# Altium PCB EXPANSION_BOARD.PcbDoc (part 2 of 2)
Units mm, origin at the board's own origin, x right, y up, seen from the top; angles counter-clockwise.
Board outline 115 x 60 mm, 2 copper layers (Top Layer, Bottom Layer), stack 1.58 mm thick; 104 components, 102 nets, 387 pads, 32 vias.
Unrouted connection lines stored in the file: 210.
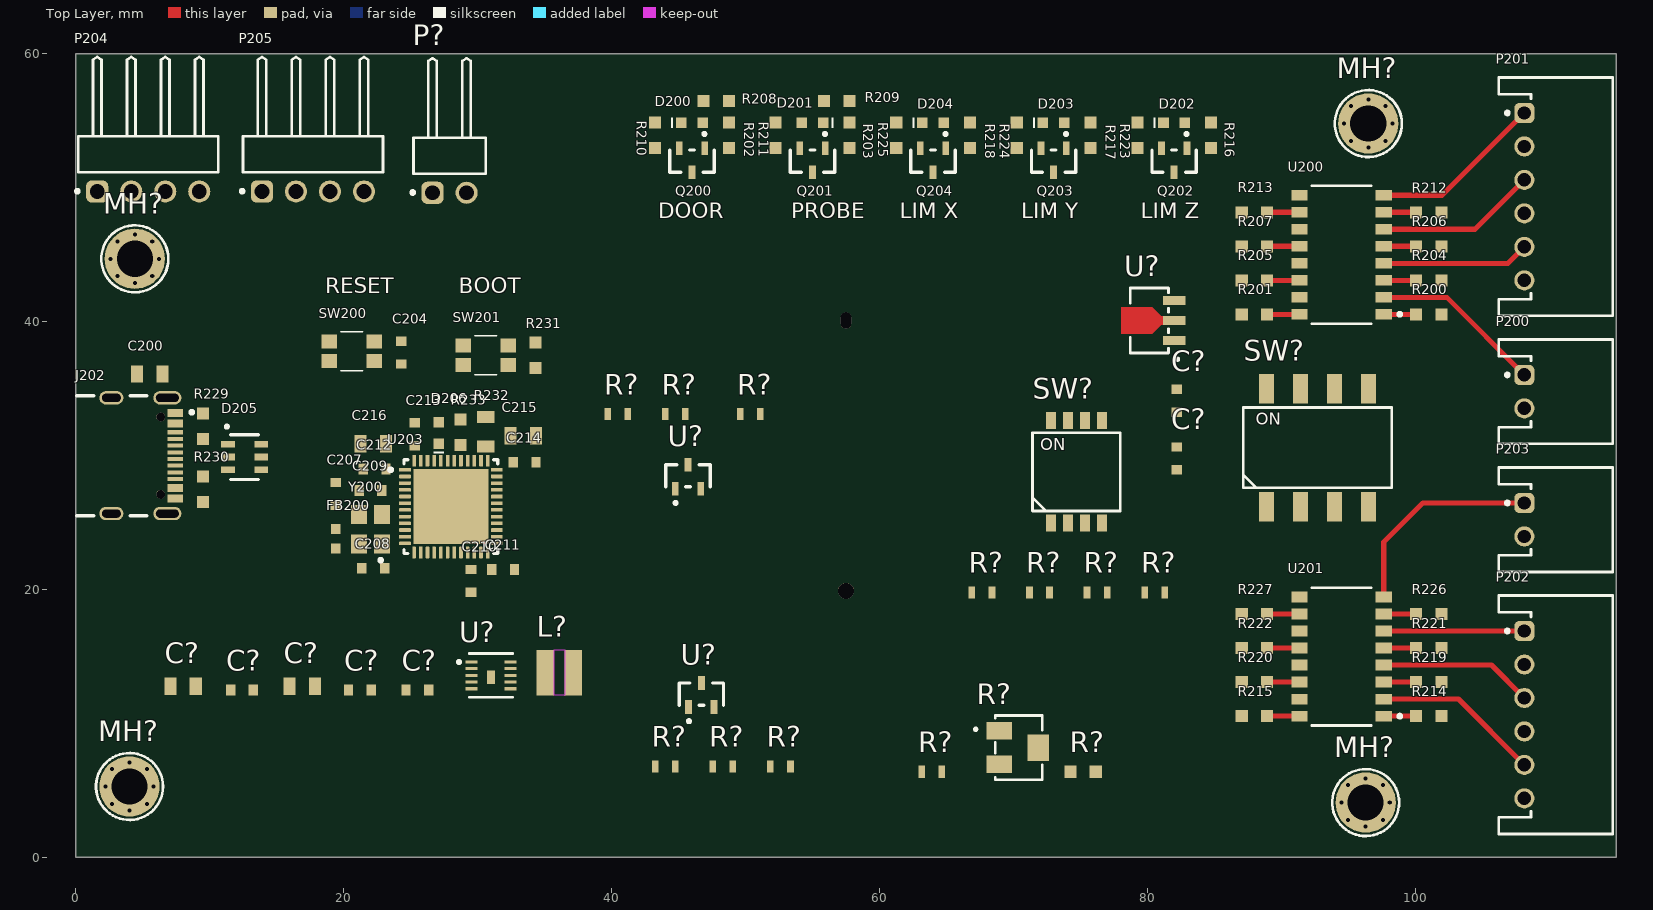
[diagram p0: Top Layer view]

## Part data (continued)
R210 R211 R223 R224 R225 R233: library part RC0603FR-07200RL, "RES 200 OHM 1% 1/10W 0603", Case Code (Imperial)=0603, Case Code (Metric)=1608, Manufacturer="Yageo Group", Max Operating Temperature=155°C, Max Power Dissipation=100mW, Min Operating Temperature=-55°C, Supplier Part Number=311-200HRCT-ND, Temperature Coefficient=±200ppm/°C, Tolerance=1%, Voltage Rating=75V, Voltage Rating (AC)=50V, Case/Package=0603, Category="Chip SMD Resistors", China RoHS=Non-Compliant, Component Link Description=https://www.yageogroup.com/content/datasheet/asset/file/PYU-RC_GROUP_51_ROHS_L, Component Link URL=https://www.yageogroup.com/content/datasheet/asset/file/PYU-RC_GROUP_51_ROHS_L, Composition="Thick Film", Contact Plating=Tin, Datasheet=https://www.yageogroup.com/content/datasheet/asset/file/PYU-RC_GROUP_51_ROHS_L, Depth=800µm, Features="Moisture Resistant", Height=450µm, Lead Free="Lead Free", Length=1.6mm, Lifecycle Status=Production, Manufacturer Part Number=RC0603FR-07200RL, Military Standard=Not, Mounting Technology="Surface Mount", Number of Terminals=2, Number of Terminations=2, Packaging="Tape & Reel", Power Dissipation=100mW, Power Rating=100mW, Radiation Hardening=No, REACH SVHC=Yes, RoHS=Compliant, Supplier=DigiKey, Termination=SMD/SMT, Voltage Rating (DC)=50V, Weight=2.012816mg, Width=800µm, Working Voltage=75V
R229 R230: library part RC0603FR-075K11L, "RES 5.11K OHM 1% 1/10W 0603", Case Code (Imperial)=0603, Case Code (Metric)=1608, Manufacturer="Yageo Group", Max Operating Temperature=155°C, Max Power Dissipation=100mW, Min Operating Temperature=-55°C, Supplier Part Number=311-5.11KHRCT-ND, Temperature Coefficient=±200ppm/°C, Tolerance=1%, Voltage Rating=75V, Voltage Rating (AC)=50V, Case/Package=0603, Category="Chip SMD Resistors", China RoHS=Non-Compliant, Component Link Description=https://www.yageogroup.com/content/datasheet/asset/file/PYU-RC_GROUP_51_ROHS_L, Component Link URL=https://www.yageogroup.com/content/datasheet/asset/file/PYU-RC_GROUP_51_ROHS_L, Composition="Thick Film", Contact Plating=Tin, Datasheet=https://www.yageogroup.com/content/datasheet/asset/file/PYU-RC_GROUP_51_ROHS_L, Depth=800µm, Features="Moisture Resistant", Height=450µm, Lead Free="Lead Free", Length=1.6mm, Lifecycle Status=Production, Manufacturer Part Number=RC0603FR-075K11L, Military Standard=Not, Mounting Technology="Surface Mount", Number of Terminals=2, Number of Terminations=2, Packaging="Tape & Reel", Power Dissipation=100mW, Power Rating=100mW, Radiation Hardening=No, REACH SVHC=Yes, RoHS=Compliant, Supplier=DigiKey, Termination=SMD/SMT, Voltage Rating (DC)=50V, Weight=2.012816mg, Width=800µm, Working Voltage=75V
R232: library part RC0805FR-070RL, "RES 0 OHM 1% 1/8W 0805", Case/Package=0805, Manufacturer="Yageo Group", Max Operating Temperature=155°C, Min Operating Temperature=-55°C, Power Dissipation=125mW, Supplier Part Number=311-0.0CRCT-ND, Temperature Coefficient=100ppm/°C, Tolerance=1%, Voltage Rating=150V, Category="Chip SMD Resistors", China RoHS=Non-Compliant, ComponentLink1Description=https://datasheet.octopart.com:443/RC0805FR-070RL-Yageo-datasheet-127823281.pdf?src-supplier=Upverter, ComponentLink1URL=https://datasheet.octopart.com:443/RC0805FR-070RL-Yageo-datasheet-127823281.pdf?src-supplier=Upverter, ComponentLink2Description=https://datasheet.octopart.com:443/RC0805FR-070RL-Yageo-datasheet-17879891.pdf?src-supplier=IHS, ComponentLink2URL=https://datasheet.octopart.com:443/RC0805FR-070RL-Yageo-datasheet-17879891.pdf?src-supplier=IHS, ComponentLink3Description=https://datasheet.octopart.com:443/RC0805FR-070RL-Yageo-datasheet-8330313.pdf?src-supplier=Burklin+Elektronik, ComponentLink3URL=https://datasheet.octopart.com:443/RC0805FR-070RL-Yageo-datasheet-8330313.pdf?src-supplier=Burklin+Elektronik, ComponentLink4Description=https://datasheet.octopart.com:443/RC0805FR-070RL-Yageo-datasheet-164759695.pdf?src-supplier=Future+Electronics, ComponentLink4URL=https://datasheet.octopart.com:443/RC0805FR-070RL-Yageo-datasheet-164759695.pdf?src-supplier=Future+Electronics, ComponentLink5Description=https://datasheet.octopart.com:443/RC0805FR-070RL-Yageo-datasheet-12592811.pdf?src-supplier=Future+Electronics, ComponentLink5URL=https://datasheet.octopart.com:443/RC0805FR-070RL-Yageo-datasheet-12592811.pdf?src-supplier=Future+Electronics, ComponentLink6Description=https://datasheet.octopart.com:443/RC0805FR-070RL-Yageo-datasheet-8324252.pdf?src-supplier=Future+Electronics, ComponentLink6URL=https://datasheet.octopart.com:443/RC0805FR-070RL-Yageo-datasheet-8324252.pdf?src-supplier=Future+Electronics, ComponentLink7Description=https://datasheet.octopart.com:443/RC0805FR-070RL-Yageo-datasheet-141265859.pdf?src-supplier=TME, ComponentLink7URL=https://datasheet.octopart.com:443/RC0805FR-070RL-Yageo-datasheet-141265859.pdf?src-supplier=TME, ComponentLink8Description=https://datasheet.octopart.com/RC0805FR-070RL-Yageo-datasheet-73766026.pdf, ComponentLink8URL=https://datasheet.octopart.com/RC0805FR-070RL-Yageo-datasheet-73766026.pdf, ComponentLink9Description=http://sigma.octopart.com:80/conflict_mineral_statement/Yageo-company-3.pdf?src-supplier=Compliance+Statements, ComponentLink9URL=http://sigma.octopart.com:80/conflict_mineral_statement/Yageo-company-3.pdf?src-supplier=Compliance+Statements, ComponentLink10Description=http://sigma.octopart.com:80/rohs_statement/Yageo-company-2.pdf?src-supplier=Compliance+Statements, ComponentLink10URL=http://sigma.octopart.com:80/rohs_statement/Yageo-company-2.pdf?src-supplier=Compliance+Statements, Composition="Thick Film", Contact Plating=Tin, Depth=1.25mm, Height=500µm, Lead Free="Lead Free", Length=2mm, Lifecycle Status=Production, Manufacturer Part Number=RC0805FR-070RL, Military Standard=Not, Mounting Technology="Surface Mount", Number of Terminals=2, Power Rating=125mW, Pricing="1=0.1, 10=0.017, 25=0.0144, 50=0.0124, 100=0.0109, 250=0.00916, 500=0.00808, 1000=0.00715 (USD)", Radiation Hardening=No, REACH SVHC=Yes, RoHS=Compliant, Stock=748818, Supplier=DigiKey, Width=1.25mm
R?: library part RC0603FR-070RL, "RES 0 OHM 1% 1/10W 0603", Case Code (Imperial)=0603, Case Code (Metric)=1608, Manufacturer="Yageo Group", Max Operating Temperature=155°C, Max Power Dissipation=100mW, Min Operating Temperature=-55°C, Supplier Part Number=311-0.0HRCT-ND, Temperature Coefficient=±200ppm/°C, Tolerance=1%, Voltage Rating=75V, Voltage Rating (AC)=50V, Case/Package=0603, Category="Chip SMD Resistors", China RoHS=Non-Compliant, Component Link Description=https://www.yageogroup.com/content/datasheet/asset/file/PYU-RC_GROUP_51_ROHS_L, Component Link URL=https://www.yageogroup.com/content/datasheet/asset/file/PYU-RC_GROUP_51_ROHS_L, Composition="Thick Film", Contact Plating=Tin, Datasheet=https://www.yageogroup.com/content/datasheet/asset/file/PYU-RC_GROUP_51_ROHS_L, Depth=800µm, Features="Moisture Resistant", Height=450µm, Lead Free="Lead Free", Length=1.6mm, Lifecycle Status=Production, Manufacturer Part Number=RC0603FR-070RL, Military Standard=Not, Mounting Technology="Surface Mount", Number of Terminals=2, Number of Terminations=2, Packaging="Tape & Reel", Power Dissipation=100mW, Power Rating=100mW, Radiation Hardening=No, REACH SVHC=Yes, RoHS=Compliant, Supplier=DigiKey, Termination=SMD/SMT, Voltage Rating (DC)=50V, Weight=2.012816mg, Width=800µm, Working Voltage=75V
R? R?: library part RC0603FR-07100RL, "RES 100 OHM 1% 1/10W 0603", Case Code (Imperial)=0603, Case Code (Metric)=1608, Manufacturer="Yageo Group", Max Operating Temperature=155°C, Max Power Dissipation=100mW, Min Operating Temperature=-55°C, Supplier Part Number=311-100HRCT-ND, Temperature Coefficient=±200ppm/°C, Tolerance=1%, Voltage Rating=75V, Voltage Rating (AC)=50V, Case/Package=0603, Category="Chip SMD Resistors", China RoHS=Non-Compliant, Component Link Description=https://www.yageogroup.com/content/datasheet/asset/file/PYU-RC_GROUP_51_ROHS_L, Component Link URL=https://www.yageogroup.com/content/datasheet/asset/file/PYU-RC_GROUP_51_ROHS_L, Composition="Thick Film", Contact Plating=Tin, Datasheet=https://www.yageogroup.com/content/datasheet/asset/file/PYU-RC_GROUP_51_ROHS_L, Depth=800µm, Features="Moisture Resistant", Height=450µm, Lead Free="Lead Free", Length=1.6mm, Lifecycle Status=Production, Manufacturer Part Number=RC0603FR-07100RL, Military Standard=Not, Mounting Technology="Surface Mount", Number of Terminals=2, Number of Terminations=2, Packaging="Tape & Reel", Power Dissipation=100mW, Power Rating=100mW, Radiation Hardening=No, REACH SVHC=Yes, RoHS=Compliant, Supplier=DigiKey, Termination=SMD/SMT, Voltage Rating (DC)=50V, Weight=2.012816mg, Width=800µm, Working Voltage=75V
R?: library part 3224W-1-103G, "TRIMMER 10K OHM 0.25W J LEAD TOP", Manufacturer=Bourns, Max Operating Temperature=150°C, Max Power Dissipation=250mW, Min Operating Temperature=-65°C, Supplier Part Number=3224W-1-103GCT-ND, Temperature Coefficient=100ppm/°C, Tolerance=10%, Working Voltage=300V, Category="Variable Resistors and Potentiometers", ComponentLink1Description=https://datasheet.octopart.com:443/3224W-1-103G-Bourns-datasheet-182141393.pdf?src-supplier=IHS, ComponentLink1URL=https://datasheet.octopart.com:443/3224W-1-103G-Bourns-datasheet-182141393.pdf?src-supplier=IHS, ComponentLink2Description=https://datasheet.octopart.com:443/3224W-1-103G-Bourns-datasheet-156011607.pdf?src-supplier=element14+APAC, ComponentLink2URL=https://datasheet.octopart.com:443/3224W-1-103G-Bourns-datasheet-156011607.pdf?src-supplier=element14+APAC, ComponentLink3Description=https://datasheet.octopart.com:443/3224W-1-103G-Bourns-datasheet-64275176.pdf?src-supplier=Master+Electronics, ComponentLink3URL=https://datasheet.octopart.com:443/3224W-1-103G-Bourns-datasheet-64275176.pdf?src-supplier=Master+Electronics, ComponentLink4Description=https://datasheet.octopart.com:443/3224W-1-103G-Bourns-datasheet-11533694.pdf?src-supplier=Arrow+Electronics, ComponentLink4URL=https://datasheet.octopart.com:443/3224W-1-103G-Bourns-datasheet-11533694.pdf?src-supplier=Arrow+Electronics, ComponentLink5Description=http://sigma.octopart.com:80/conflict_mineral_statement/Bourns-company-36.pdf?src-supplier=Compliance+Statements, ComponentLink5URL=http://sigma.octopart.com:80/conflict_mineral_statement/Bourns-company-36.pdf?src-supplier=Compliance+Statements, Composition=Cermet, Depth=3.9mm, Height=5.1mm, Length=4.8mm, Lifecycle Status=Production, Manufacturer Part Number=3224W-1-103G, Military Standard=Not, Mounting Technology="Surface Mount", Number of Terminals=3, Number of Turns=12, Packaging="Tape & Reel (TR)", Power Rating=250mW, Pricing="1=3.93, 10=3.271, 25=3.038, 50=2.8722, 100=2.7147, 250=2.51884, 500=2.3796 (USD)", REACH SVHC=No, RoHS=Compliant, Stock=792, Supplier=DigiKey, Termination=SMD/SMT, Width=3.5mm
R? R?: library part RC0603FR-0711K5L, "RES 11.5K OHM 1% 1/10W 0603", Case Code (Imperial)=0603, Case Code (Metric)=1608, Manufacturer="Yageo Group", Max Operating Temperature=155°C, Max Power Dissipation=100mW, Min Operating Temperature=-55°C, Supplier Part Number=311-11.5KHRCT-ND, Temperature Coefficient=±200ppm/°C, Tolerance=1%, Voltage Rating=75V, Voltage Rating (AC)=50V, Case/Package=0603, Category="Chip SMD Resistors", China RoHS=Non-Compliant, Component Link Description=https://www.yageogroup.com/content/datasheet/asset/file/PYU-RC_GROUP_51_ROHS_L, Component Link URL=https://www.yageogroup.com/content/datasheet/asset/file/PYU-RC_GROUP_51_ROHS_L, Composition="Thick Film", Contact Plating=Tin, Datasheet=https://www.yageogroup.com/content/datasheet/asset/file/PYU-RC_GROUP_51_ROHS_L, Depth=800µm, Features="Moisture Resistant", Height=450µm, Lead Free="Lead Free", Length=1.6mm, Lifecycle Status=Production, Manufacturer Part Number=RC0603FR-0711K5L, Military Standard=Not, Mounting Technology="Surface Mount", Number of Terminals=2, Number of Terminations=2, Packaging="Tape & Reel", Power Dissipation=100mW, Power Rating=100mW, Radiation Hardening=No, REACH SVHC=Yes, RoHS=Compliant, Supplier=DigiKey, Termination=SMD/SMT, Voltage Rating (DC)=50V, Weight=2.012816mg, Width=800µm, Working Voltage=75V
R?: library part RC0603FR-071KL, "RES 1K OHM 1% 1/10W 0603", Case Code (Imperial)=0603, Case Code (Metric)=1608, Manufacturer="Yageo Group", Max Operating Temperature=155°C, Max Power Dissipation=100mW, Min Operating Temperature=-55°C, Supplier Part Number=311-1.00KHRCT-ND, Temperature Coefficient=±200ppm/°C, Tolerance=1%, Voltage Rating=75V, Voltage Rating (AC)=50V, Case/Package=0603, Category="Chip SMD Resistors", China RoHS=Non-Compliant, Component Link Description=https://www.yageogroup.com/content/datasheet/asset/file/PYU-RC_GROUP_51_ROHS_L, Component Link URL=https://www.yageogroup.com/content/datasheet/asset/file/PYU-RC_GROUP_51_ROHS_L, Composition="Thick Film", Contact Plating=Tin, Datasheet=https://www.yageogroup.com/content/datasheet/asset/file/PYU-RC_GROUP_51_ROHS_L, Depth=800µm, Features="Moisture Resistant", Height=450µm, Lead Free="Lead Free", Length=1.6mm, Lifecycle Status=Production, Manufacturer Part Number=RC0603FR-071KL, Military Standard=Not, Mounting Technology="Surface Mount", Number of Terminals=2, Number of Terminations=2, Packaging="Tape & Reel", Power Dissipation=100mW, Power Rating=100mW, Radiation Hardening=No, REACH SVHC=Yes, RoHS=Compliant, Supplier=DigiKey, Termination=SMD/SMT, Voltage Rating (DC)=50V, Weight=2.012816mg, Width=800µm, Working Voltage=75V
R? R?: library part RC0603FR-078K87L, "RES 8.87K OHM 1% 1/10W 0603", Case Code (Imperial)=0603, Case Code (Metric)=1608, Manufacturer="Yageo Group", Max Operating Temperature=155°C, Max Power Dissipation=100mW, Min Operating Temperature=-55°C, Supplier Part Number=311-8.87KHRCT-ND, Temperature Coefficient=±200ppm/°C, Tolerance=1%, Voltage Rating=75V, Voltage Rating (AC)=50V, Case/Package=0603, Category="Chip SMD Resistors", China RoHS=Non-Compliant, Component Link Description=https://www.yageogroup.com/content/datasheet/asset/file/PYU-RC_GROUP_51_ROHS_L, Component Link URL=https://www.yageogroup.com/content/datasheet/asset/file/PYU-RC_GROUP_51_ROHS_L, Composition="Thick Film", Contact Plating=Tin, Datasheet=https://www.yageogroup.com/content/datasheet/asset/file/PYU-RC_GROUP_51_ROHS_L, Depth=800µm, Features="Moisture Resistant", Height=450µm, Lead Free="Lead Free", Length=1.6mm, Lifecycle Status=Production, Manufacturer Part Number=RC0603FR-078K87L, Military Standard=Not, Mounting Technology="Surface Mount", Number of Terminals=2, Number of Terminations=2, Packaging="Tape & Reel", Power Dissipation=100mW, Power Rating=100mW, Radiation Hardening=No, REACH SVHC=Yes, RoHS=Compliant, Supplier=DigiKey, Termination=SMD/SMT, Voltage Rating (DC)=50V, Weight=2.012816mg, Width=800µm, Working Voltage=75V
SW200 SW201: "WS-TASV J-Bend SMT Tact Switch, 3.5mm x 2.9mm x 1.7mm, SPST-NO, 350gf, 12V, 50mA", Manufacturer="Wurth Elektronik", Operating Temperature Max=85degC, Operating Temperature Min=-40degC, Rated Current=50mA, Rated Voltage (DC)=12V, Category="Tact Switch", Circuit=SPST-NO, ComponentLink1Description="Website Link", ComponentLink1URL=https://www.we-online.com, ComponentLink2Description="Datasheet Link", ComponentLink2URL=https://www.we-online.com/components/products/datasheet/434153017835, Contact Material="Stainless Steel", Contact Plating=Silver, Height=1.7mm, Length=3.5mm, Manufacturer Part Number=434153017835, Match Code=WS-TASV, Mount="Surface Mount", Operation Force=350gf, Packaging="Tape and Reel", Terminal Material="Copper Alloy", Terminal Plating=Silver, Washable=No, Width=2.9mm
SW?: "WS-DISV Small Compact SMT Dip Switch, Raised Actuator, pitch 2.54mm, 4p", Manufacturer="Wurth Elektronik", Operating Temperature Max=85degC, Operating Temperature Min=-40degC, Rated Current Non-Switching=100mA, Rated Current Switching=25mA, Rated Voltage Non-Switching=50VDC, Rated Voltage Switching=24VDC, Actuator Type="Raise Type", Category="Dip Switches", ComponentLink1Description="Website Link", ComponentLink1URL=https://www.we-online.com/redexpert/article/418121270804?ad, ComponentLink2Description="Datasheet Link", ComponentLink2URL=https://www.we-online.com/redexpert/spec/418121270804?ad, Contact Material="Copper Alloy", Contact Plating=Gold, Manufacturer Part Number=418121270804, Match Code=WS-DISV, Mount="Surface Mount", Number of Poles=4, Operation Force=600g, Packaging="Tape and Reel", Pitch=2.54mm
SW?: "WS-DISV Small Compact SMD Dip Switch, Flat Actuator with Top Tape, pitch 1.27mm, 4p", Manufacturer="Wurth Elektronik", Max Operating Temperature=85°C, Min Operating Temperature=-40°C, Rated Current Non-Switching=100mA, Rated Current Switching=25mA, Rated Voltage Non-Switching=50VDC, Rated Voltage Switching=24VDC, Actuator Type="Flat Type", Category="Dip Switches", ComponentLink1Description="Website Link", ComponentLink1URL=https://www.we-online.com/redexpert/article/416131160804?ad, ComponentLink2Description="Datasheet Link", ComponentLink2URL=https://www.we-online.com/redexpert/spec/416131160804?ad, Contact Material="Copper Alloy", Contact Plating=Gold, Manufacturer Part Number=416131160804, Match Code=WS-DISV, Mount="Surface Mount", Number of Poles=4, Operation Force=500g, Packaging="Tape and Reel", Pitch=1.27mm
U200 U201: "OPTOISO 3.75KV 4CH TRANS 16-SO", Case/Package=SOIC, Collector Emitter Breakdown Voltage=80V, Collector Emitter Saturation Voltage=300mV, Current Transfer Ratio=50%, Dark Current=80nA, Forward Current=50mA, Forward Voltage=1.4V, Isolation Voltage=3.75kV, Manufacturer=Toshiba, Manufacturer Part Number=TLP293-4(TP,E, Max Junction Temperature (Tj)=125°C, Max Power Dissipation=100mW, Min Operating Temperature=-55°C, Supplier Part Number=TLP293-4(TPECT-ND, Category=Optocouplers, Collector Emitter Voltage (VCEO)=300mV, ComponentLink1Description=https://datasheet.octopart.com:443/TLP293-4%28TP%2CE-Toshiba-datasheet-165584699.pdf?src-supplier=IHS, ComponentLink1URL=https://datasheet.octopart.com:443/TLP293-4%28TP%2CE-Toshiba-datasheet-165584699.pdf?src-supplier=IHS, ComponentLink2Description=https://datasheet.octopart.com:443/TLP293-4%28TP%2CE-Toshiba-datasheet-62096132.pdf?src-supplier=Upverter, ComponentLink2URL=https://datasheet.octopart.com:443/TLP293-4%28TP%2CE-Toshiba-datasheet-62096132.pdf?src-supplier=Upverter, Height=2.3mm, Lifecycle Status=Production, Max Operating Temperature=125°C, Max Output Voltage=80V, Mounting Technology="Surface Mount", Number of Channels=4, Number of Elements=4, Output Current per Channel=50mA, Packaging="Tape & Reel (TR)", Pins=16, Pricing="1=1.54, 10=1.093, 100=0.8233, 500=0.704, 1000=0.66505 (USD)", REACH SVHC=Yes, RoHS=Compliant, Schedule B="8541408000, 8541408000|8541408000|8541408000|8541408000|8541408000", Stock=42408, Supplier=DigiKey, Turn-Off Delay Time=3µs, Turn-On Delay Time=3µs
U203: "IC MCU 32BIT 512KB FLSH 48UFQFPN", Case/Package=UFQFPN, Clock Frequency=26MHz, Frequency=100MHz, Manufacturer=STMicroelectronics, Max Operating Temperature=85°C, Max Power Dissipation=625mW, Max Supply Current=34.5mA, Max Supply Voltage=3.6V, Min Operating Temperature=-40°C, Min Supply Voltage=1.7V, Nominal Supply Current=1.8µA, Operating Supply Voltage=3.3V, Supplier Part Number=497-14907-ND, ADC Channels (Resolution)="10-Ch 12-Bit", Category=Microcontrollers, China RoHS=Compliant, ComponentLink1Description=https://datasheet.octopart.com:443/STM32F411CEU6-STMicroelectronics-datasheet-41919523.pdf?src-supplier=element14+APAC, ComponentLink1URL=https://datasheet.octopart.com:443/STM32F411CEU6-STMicroelectronics-datasheet-41919523.pdf?src-supplier=element14+APAC, ComponentLink2Description=https://datasheet.octopart.com:443/STM32F411CEU6-STMicroelectronics-datasheet-27102711.pdf?src-supplier=Upverter, ComponentLink2URL=https://datasheet.octopart.com:443/STM32F411CEU6-STMicroelectronics-datasheet-27102711.pdf?src-supplier=Upverter, ComponentLink3Description=https://datasheet.octopart.com:443/STM32F411CEU6-STMicroelectronics-datasheet-114750309.pdf?src-supplier=Newark, ComponentLink3URL=https://datasheet.octopart.com:443/STM32F411CEU6-STMicroelectronics-datasheet-114750309.pdf?src-supplier=Newark, ComponentLink4Description=https://datasheet.octopart.com:443/STM32F411CEU6-STMicroelectronics-datasheet-34219326.pdf?src-supplier=Newark, ComponentLink4URL=https://datasheet.octopart.com:443/STM32F411CEU6-STMicroelectronics-datasheet-34219326.pdf?src-supplier=Newark, ComponentLink5Description=https://datasheet.octopart.com:443/STM32F411CEU6-STMicroelectronics-datasheet-82511007.pdf?src-supplier=SHENGYU+ELECTRONICS, ComponentLink5URL=https://datasheet.octopart.com:443/STM32F411CEU6-STMicroelectronics-datasheet-82511007.pdf?src-supplier=SHENGYU+ELECTRONICS, Core Architecture="ARM Cortex-M4", Data Bus Width=32b, EEPROM Memory Size=0B, Flash Memory Size=512kB, Height - Seated (Max)=600µm, Interface="SDIO, USB", Lead Free="Lead Free", Length=7mm, Lifecycle Status=Production, Manufacturer Part Number=STM32F411CEU6, Memory Format=FLASH, Memory Size=512kB, Mounting Technology="Surface Mount", Number of A/D Converters=1, Number of ADC Channels=16, Number of Channels=10, Number of I2C Channels=3, Number of I/Os=36, Number of Interrupts=16, Number of Programmable I/O=36, Number of SPI Channels=5, Number of Terminals=48, Number of Timers/Counters=2, Number of USART Channels=3, Oscillator Type=Internal, Packaging="Cut Tape", Peripherals=POR, Pins=48, Pricing="1=6.18, 10=4.745, 25=4.386, 100=3.991, 260=3.79569, 520=3.68344, 1040=3.59105, 2600=3.49353 (USD)", Radiation Hardening=No, RAM Size=128kB, REACH SVHC=Yes, RoHS=Compliant, Schedule B="8542310000, 8542310000|8542310000|8542310000|8542310000|8542310000|8542310000|8542310000|8542310000|8542310000|8542310000|8542310000|8542310000|8542310000|8542310000|8542310000|8542310000|8542310000|8542310000|8542310000|8542310000|8542310000|8542310000|8542310000|85", Stock=3816, Supplier=DigiKey, Terminal Pitch=500µm, Watchdog Timer=Yes, Width=7mm
U?: "IC REG LINEAR 3.3V 200MA SOT89", Manufacturer=STMicroelectronics, Max Junction Temperature (Tj)=125°C, Max Supply Voltage=13.2V, Min Input Voltage=4.3V, Output Current=200mA, Output Voltage=3.3V, Supplier Part Number=497-17107-1-ND, Voltage Tolerance=3%, Category="LDO Voltage Regulators", China RoHS=Compliant, ComponentLink1Description=https://datasheet.octopart.com:443/LDK220U33R-STMicroelectronics-datasheet-164563982.pdf?src-supplier=IHS, ComponentLink1URL=https://datasheet.octopart.com:443/LDK220U33R-STMicroelectronics-datasheet-164563982.pdf?src-supplier=IHS, ComponentLink2Description=https://datasheet.octopart.com:443/LDK220U33R-STMicroelectronics-datasheet-78844600.pdf?src-supplier=HQonline, ComponentLink2URL=https://datasheet.octopart.com:443/LDK220U33R-STMicroelectronics-datasheet-78844600.pdf?src-supplier=HQonline, ComponentLink3Description=https://datasheet.octopart.com:443/LDK220U33R-STMicroelectronics-datasheet-101746762.pdf?src-supplier=SHENGYU+ELECTRONICS, ComponentLink3URL=https://datasheet.octopart.com:443/LDK220U33R-STMicroelectronics-datasheet-101746762.pdf?src-supplier=SHENGYU+ELECTRONICS, Height - Seated (Max)=1.6mm, Length=4.5mm, Lifecycle Status=Production, Manufacturer Part Number=LDK220U33R, Number of Channels=1, Number of Circuits=1, Number of Outputs=1, Number of Terminals=3, Output Type=Fixed, Packaging="Cut Tape", Pricing="1=0.39, 10=0.268, 25=0.2388, 100=0.2061, 250=0.1906, 500=0.18124, 1000=0.17353 (USD)", REACH SVHC=Yes, RoHS=Compliant, Schedule B="8542390000, 8542390000|8542390000|8542390000|8542390000|8542390000", Stock=20368, Supplier=DigiKey, Terminal Pitch=1.495mm, Width=2.445mm
U?: "IC REG BUCK 3.3V 300MA 10DFN", Manufacturer=STMicroelectronics, Max Operating Temperature=150°C, Max Output current=300mA, Max Output Voltage=60V, Max Switching Frequency=2.42MHz, Min Input Voltage=3.5V, Min Operating Temperature=-40°C, Min Output Voltage=850mV, Nominal Output Voltage=3.3V, Nominal Supply Voltage=24V, Quiescent Current=10µA, Supplier Part Number=497-L7983PU33RCT-ND, Category="Voltage Regulators - Switching", China RoHS=Compliant, Country of Origin="Mainland China", Export Control Classification Number (ECCN) Code=EAR99, Harmonized Tariff Schedule (HTS) Code=8542.39.00.60, Height - Seated (Max)=800µm, Introduction Date=2020-10-06, Length=3mm, Lifecycle Status=Production, Manufacturer Part Number=L7983PU33R, Max Supply Voltage=60V, Number of Circuits=1, Number of Terminals=10, Output Current=300mA, Packaging="Tape and Reel", Pricing="1=2.69, 10=2.001, 25=1.83, 100=1.6411, 250=1.55108, 500=1.5155 (USD)", REACH SVHC=Yes, RoHS=Compliant, Schedule B="8542390000, 8542390000|8542390000|8542390000|8542390000|8542390000|8542390000|8542390000|8542390000|8542390000|8542390000|8542390000|8542390000|8542390000|8542390000|8542390000|8542390000|8542390000|8542390000|8542390000|8542390000|8542390000|8542390000|8542390000|85", Stock=4366, Supplier=DigiKey, Synchronous Rectifier=Yes, Terminal Pitch=500µm, Topology=Buck, Width=3mm
U? U?: "IC VREF SHUNT ADJ 0.25% SOT23-3", Case/Package=SOT-23, Cathode Current=400µA, Manufacturer=STMicroelectronics, Max Operating Temperature=125°C, Max Output current=100mA, Max Output Voltage=1.243V, Max Supply Voltage=25V, Min Operating Temperature=-40°C, Min Output Voltage=1.237V, Min Supply Voltage=1.24V, Output Voltage=24V, Supplier Part Number=497-4637-1-ND, Temperature Coefficient=100ppm/°C, Tolerance=0.25%, Category="Voltage References", China RoHS=Compliant, ComponentLink1Description=https://datasheet.octopart.com:443/TS3431CILT-STMicroelectronics-datasheet-12523092.pdf?src-supplier=SHENGYU+ELECTRONICS, ComponentLink1URL=https://datasheet.octopart.com:443/TS3431CILT-STMicroelectronics-datasheet-12523092.pdf?src-supplier=SHENGYU+ELECTRONICS, ComponentLink2Description=https://datasheet.octopart.com:443/TS3431CILT-STMicroelectronics-datasheet-10408717.pdf?src-supplier=Upverter, ComponentLink2URL=https://datasheet.octopart.com:443/TS3431CILT-STMicroelectronics-datasheet-10408717.pdf?src-supplier=Upverter, ComponentLink3Description=https://datasheet.octopart.com:443/TS3431CILT-STMicroelectronics-datasheet-124172.pdf?src-supplier=Farnell, ComponentLink3URL=https://datasheet.octopart.com:443/TS3431CILT-STMicroelectronics-datasheet-124172.pdf?src-supplier=Farnell, ComponentLink4Description=https://datasheet.octopart.com:443/TS3431CILT-STMicroelectronics-datasheet-140368796.pdf?src-supplier=TME, ComponentLink4URL=https://datasheet.octopart.com:443/TS3431CILT-STMicroelectronics-datasheet-140368796.pdf?src-supplier=TME, ComponentLink5Description=https://datasheet.octopart.com:443/TS3431CILT-STMicroelectronics-datasheet-18487.pdf?src-supplier=DigiKey, ComponentLink5URL=https://datasheet.octopart.com:443/TS3431CILT-STMicroelectronics-datasheet-18487.pdf?src-supplier=DigiKey, Height=1.02mm, Height - Seated (Max)=1.12mm, Lead Free="Lead Free", Length=2.9mm, Lifecycle Status=Production, Manufacturer Part Number=TS3431CILT, Mounting Technology="Surface Mount", Nominal Output Voltage=1.24V, Nominal Supply Current=400µA, Nominal Supply Voltage=1.24V, Number of Channels=1, Number of Circuits=1, Number of Outputs=1, Number of Terminals=3, Output Current=100mA, Packaging="Tape and Reel", Pins=3, Pricing="1=0.62, 10=0.44, 25=0.3944, 100=0.3441, 250=0.32016, 500=0.30574, 1000=0.29386 (USD)", Radiation Hardening=No, REACH SVHC=Yes, Reference Type="Adjustable, Shunt", Reference Voltage=1.24V, RoHS=Compliant, Schedule B="8542390000, 8542390000|8542390000|8542390000|8542390000|8542390000", Stock=16066, Supplier=DigiKey, Terminal Pitch=950µm, Termination=SMD/SMT, Width=1.3mm
Y200: library part 830055474, "WE-XTAL Quartz Crystal, CFPX-180, 25MHz, +/-50ppm", Case/Size Code=CFPX-180, Frequency Stability=50ppm, Frequency Tolerance=+/-50ppm, Load Capacitance=16pF, Manufacturer="Wurth Elektronik", Operating Temperature Max=85degC, Operating Temperature Min=-40degC, Application="Processor, USB, 3G/4G/5G, Ethernet, Small Cell, PHY, PCI Express", Category=Crystals, ComponentLink1Description="Website Link", ComponentLink1URL=https://www.we-online.com/redexpert/article/830055474?ad, ComponentLink2Description="Datasheet Link", ComponentLink2URL=https://www.we-online.com/redexpert/spec/830055474?ad, Frequency=25MHz, Height=0.8mm, Length=3.2mm, Manufacturer Part Number=830055474, Match Code=WE-XTAL, Mount="Surface Mount", Packaging="Tape and Reel", Width=2.5mm

## Via types
v1: diameter 0.6, hole 0.3, Top Layer to Bottom Layer, 32 vias

## Nets (pads, with @x,y where several pads share a name; then routed paths per layer and width w, separated by ;. In a path a pad name is that pad's centre, name@x,y a point inside that pad or via, vN(x,y) a via of type N, cw(c..) or ccw(c..) an arc to the next point about the centre after c; other vN are vias at no path point)
+3V3: C?.2@13.25,12.5 C?.2@22.05,12.5 C?.2@26.35,12.5 J?.5 J?.7 L?.2 P?.1 Q200.3 Q201.3 Q202.3 Q203.3 Q204.3 R232.1 R?.1@63.15,6.4 R?.2@41.2,33.1 R?.2@45.5,33.1 SW?.5@76.605,32.61 SW?.6@75.335,32.61 SW?.7@74.065,32.61 SW?.8@72.795,32.61 U?.1@29.552,14.6 U?.2@29.552,14.1
+3V3_ISO: C?.2@82.2,34.95 R200.1 R204.1 R206.1 R212.1 R214.1 R219.1 R221.1 R226.1 U?.1@82.006,38.605
+5V_ISO: C?.2@82.2,30.65 J?.1 J?.3 U?.3@82.006,41.595
+24V_PSU: C?.2@17.85,12.8 J?.2 J?.4 U?.7 U?.8
+VBUS: C200.2 D205.5 J202.A4_B9 J202.B4_A9
+VDD_MCU: C211.2 C212.2 C213.2 C214.2 C215.2 C216.2 FB200.2 P204.1 P205.1 R232.2 R233.2 U203.1 U203.24 U203.36 U203.48
+VREF_DCMT: J?.10 J?.12 R?.1@51.85,6.8 R?.2@49.05,6.8
+VREF_STPR: J?.6 J?.8 R?.1@43.25,6.8 R?.2@51.1,33.1
BOOT: R231.2 U203.44
DECAY: J?.20 R?.2@79.8,19.8 SW?.4@76.605,24.99
GND: C200.1 C204.1 C207.1 C208.1 C209.1 C210.1 C211.1 C212.1 C213.1 C214.1 C215.1 C216.1 C?.1@7.05,12.8 C?.1@11.55,12.5 C?.1@15.95,12.8 C?.1@20.35,12.5 C?.1@24.65,12.5 D200.2 D201.1 D202.2 D203.2 D204.2 D205.2 D206.1 J202.A1_B12 J202.B1_A12 J202.SH J?.38 J?.40 MH?.H P204.4 P205.4 R208.1 R209.1 R229.1 R230.1 R231.1 R?.1@68.4,19.8 R?.1@68.95,9.45 R?.1@72.7,19.8 R?.1@77,19.8 R?.1@81.3,19.8 R?.2@44.75,6.8 R?.2@53.35,6.8 R?.2@76.15,6.4 U200.9 U200.11 U200.13 U200.15 U201.9 U201.11 U201.13 U201.15 U203.8 U203.23 U203.35 U203.47 U203.49 U?.3@45.7,29.332 U?.3@46.7,13.032 U?.10 U?.11 Y200.2 Y200.4
  other v1: 96.3,2.3 95,2.8 97.6,2.8 4,3.5 2.7,4 5.3,4 94.5,4.1 98.1,4.1 2.2,5.3 5.8,5.3 95,5.4 97.6,5.4 96.3,5.9 2.7,6.6 5.3,6.6 4,7.1 4.4,42.9 3.1,43.4 5.7,43.4 2.6,44.7 6.2,44.7 3.1,46 5.7,46 4.4,46.5 96.5,53 95.2,53.5 97.8,53.5 94.7,54.8 98.3,54.8 95.2,56.1 97.8,56.1 96.5,56.6
GND_ISO: C?.1@82.2,28.95 C?.1@82.2,33.25 J?.37 J?.39 P200.2 P201.2 P201.4 P201.6 P202.2 P202.4 P202.6 P203.2 U?.2@82.006,40.1
MCU_CO_FLOO: U203.3
MCU_CO_MIST_1: U203.40
MCU_CO_MIST_2: U203.4
MCU_DIR_M3: U203.17
MCU_DIR_X: U203.11
MCU_DIR_Y: U203.13
MCU_DIR_Z: U203.15
MCU_DOOR: R201.2 R202.2 R208.2 U203.46
MCU_DR_ENA: U203.18
MCU_HOLD: R213.2 U203.43
MCU_LIM_M4: U203.21
MCU_LIM_X: R222.2 U203.25
MCU_LIM_Y: R217.2 R220.2 U203.26
MCU_LIM_Z: R215.2 R216.2 R218.2 U203.27
MCU_PROBE: R203.2 R209.2 R227.2 U203.28
MCU_SOFT_RST: R207.2 U203.42
MCU_SP_DIR: U203.20
MCU_SP_ENA: U203.19
MCU_SP_INDEX: U203.39
MCU_SP_PULSE: U203.38
MCU_SP_PWM: U203.29
MCU_START: R205.2 U203.45
MCU_STP_M3: U203.16
MCU_STP_X: U203.10
MCU_STP_Y: U203.12
MCU_STP_Z: U203.14
MCU_SWCLK: P205.3 U203.37
MCU_SWDIO: P205.2 U203.34
MCU_UART_RX: P204.2 U203.30
MCU_UART_TX: P204.3 U203.31
MS1: J?.14 R?.2@66.9,19.8 SW?.1@72.795,24.99
MS2: J?.16 R?.2@71.2,19.8 SW?.2@74.065,24.99
MS3: J?.18 R?.2@75.5,19.8 SW?.3@75.335,24.99
NetC207_2: C207.2 FB200.1 U203.9
NetC208_2: C208.2 U203.6 Y200.1
NetC209_2: C209.2 U203.5 Y200.3
NetC210_2: C210.2 U203.22
NetC?_2: C?.2@8.95,12.8 U?.3@29.552,13.6 U?.5
NetD200_1: D200.1 R210.1
NetD201_2: D201.2 R211.1
NetD202_1: D202.1 R223.1
NetD203_1: D203.1 R224.1
NetD204_1: D204.1 R225.1
NetD206_2: D206.2 R233.1
NetJ202_A5: J202.A5 R229.2
NetJ202_B5: J202.B5 R230.2
NetL?_1: L?.1 U?.9
NetQ200_1: Q200.1 R202.1
NetQ200_2: Q200.2 R210.2
NetQ201_1: Q201.1 R203.1
NetQ201_2: Q201.2 R211.2
NetQ202_1: Q202.1 R216.1
NetQ202_2: Q202.2 R223.2
NetQ203_1: Q203.1 R217.1
NetQ203_2: Q203.2 R224.2
NetQ204_1: Q204.1 R218.1
NetQ204_2: Q204.2 R225.2
NetR200_2: R200.2 U200.1 | length 2.6
  Top Layer w0.381: U200.1 R200.2@100.25,40.555
NetR201_1: R201.1 U200.16 | length 2.6
  Top Layer w0.381: R201.1@88.75,40.555 U200.16
NetR204_2: R204.2 U200.3 | length 2.6
  Top Layer w0.381: U200.3 R204.2@100.25,43.095
NetR205_1: R205.1 U200.14 | length 2.6
  Top Layer w0.381: R205.1@88.75,43.095 U200.14
NetR206_2: R206.2 U200.5 | length 2.6
  Top Layer w0.381: U200.5 R206.2@100.25,45.635
NetR207_1: R207.1 U200.12 | length 2.6
  Top Layer w0.381: R207.1@88.75,45.635 U200.12
NetR212_2: R212.2 U200.7 | length 2.6
  Top Layer w0.381: U200.7 R212.2@100.25,48.175
NetR213_1: R213.1 U200.10 | length 2.6
  Top Layer w0.381: R213.1@88.75,48.175 U200.10
NetR214_2: R214.2 U201.1 | length 2.6
  Top Layer w0.381: U201.1 R214.2@100.25,10.555
NetR215_1: R215.1 U201.16 | length 2.6
  Top Layer w0.381: R215.1@88.75,10.555 U201.16
NetR219_2: R219.2 U201.3 | length 2.6
  Top Layer w0.381: U201.3 R219.2@100.25,13.095
NetR220_1: R220.1 U201.14 | length 2.6
  Top Layer w0.381: R220.1@88.75,13.095 U201.14
NetR221_2: R221.2 U201.5 | length 2.6
  Top Layer w0.381: U201.5 R221.2@100.25,15.635
NetR222_1: R222.1 U201.12 | length 2.6
  Top Layer w0.381: R222.1@88.75,15.635 U201.12
NetR226_2: R226.2 U201.7 | length 2.6
  Top Layer w0.381: U201.7 R226.2@100.25,18.175
NetR227_1: R227.1 U201.10 | length 2.6
  Top Layer w0.381: R227.1@88.75,18.175 U201.10
NetR?_1: R?.1@44,33.1 R?.1@47.55,6.8 U?.1@44.75,27.535 U?.2@46.65,27.535
NetR?_2: R?.2@64.65,6.4 R?.3
NRST: C204.2 U203.7
OPT_DOOR: P200.1 U200.2 | length 12.9
  Top Layer w0.381: U200.2 102.355,41.825 P200.1
OPT_HOLD: P201.1 U200.8 | length 13
  Top Layer w0.381: U200.8 102.005,49.445 P201.1
OPT_LIM_X: P202.1 U201.6 | length 10.5
  Top Layer w0.381: U201.6 97.652,16.907 108.148,16.907 P202.1
OPT_LIM_Y: P202.3 U201.4 | length 11.5
  Top Layer w0.381: U201.4 105.695,14.365 P202.3
OPT_LIM_Z: P202.5 U201.2 | length 12.5
  Top Layer w0.381: U201.2 103.235,11.825 P202.5
OPT_PROBE: P203.1 U201.8 | length 15.8
  Top Layer w0.381: U201.8 97.65,23.55 100.57,26.47 P203.1
OPT_SOFT_R: P201.3 U200.6 | length 12
  Top Layer w0.381: U200.6 104.465,46.905 P201.3
OPT_START: P201.5 U200.4 | length 11
  Top Layer w0.381: U200.4 106.925,44.365 P201.5
USB_D_N: D205.6 U203.32
USB_D_P: D205.4 U203.33
USB_DI_N: D205.1 J202.A7 J202.B7
USB_DI_P: D205.3 J202.A6 J202.B6
VAC_DIR: J?.22 P?.2
VAC_SPEED: J?.24 R?.2@71.85,8.2
pads on no net: J202. J202.A8 J202.B8 J?.9 J?.11 J?.13 J?.15 J?.17 J?.19 J?.21 J?.23 J?.25 J?.26 J?.27 J?.28 J?.29 J?.30 J?.31 J?.32 J?.33 J?.34 J?.35 J?.36 J?.M1 J?.M2 R?.1@39.7,33.1 R?.1@49.6,33.1 R?.1@74.25,6.4 SW200.A1 SW200.A2 SW200.B1 SW200.B2 SW201.A1 SW201.A2 SW201.B1 SW201.B2 SW?.1@88.89,26.2 SW?.2@91.43,26.2 SW?.3@93.97,26.2 SW?.4@96.51,26.2 SW?.5@96.51,35 SW?.6@93.97,35 SW?.7@91.43,35 SW?.8@88.89,35 U203.2 U203.41 U?.1@45.75,11.235 U?.2@47.65,11.235 U?.4 U?.6

## Silkscreen, mask and mechanical layers (free items; w line width, h text height)
Top Overlay:
  text "DOOR" at 43.5,47.33 h2
  text "PROBE" at 53.4,47.33 h2
  text "LIM X" at 61.5,47.3 h2
  text "LIM Y" at 70.6,47.3 h2
  text "LIM Z" at 79.5,47.3 h2
  text "RESET" at 18.6,41.73 h2
  text "BOOT" at 28.6,41.73 h2

## Text inside footprints (layer, text, board x,y; h text height)
SW?: Top Overlay "ON" at 88.09,32.3 h0.89; Top Component Outline "ON" at 88.09,32.3 h0.89
SW?: Top Overlay "ON" at 71.995,30.4 h0.89; Top Component Outline "ON" at 71.995,30.4 h0.89